# Altium PCB PCB.PcbDoc
Units mm, origin at the board's own origin, x right, y up, seen from the top; angles counter-clockwise.
Board outline 20 x 20 mm, 2 copper layers (Top Layer, Bottom Layer), stack 1.671 mm thick; 5 components, 4 nets, 10 pads, 1 vias.
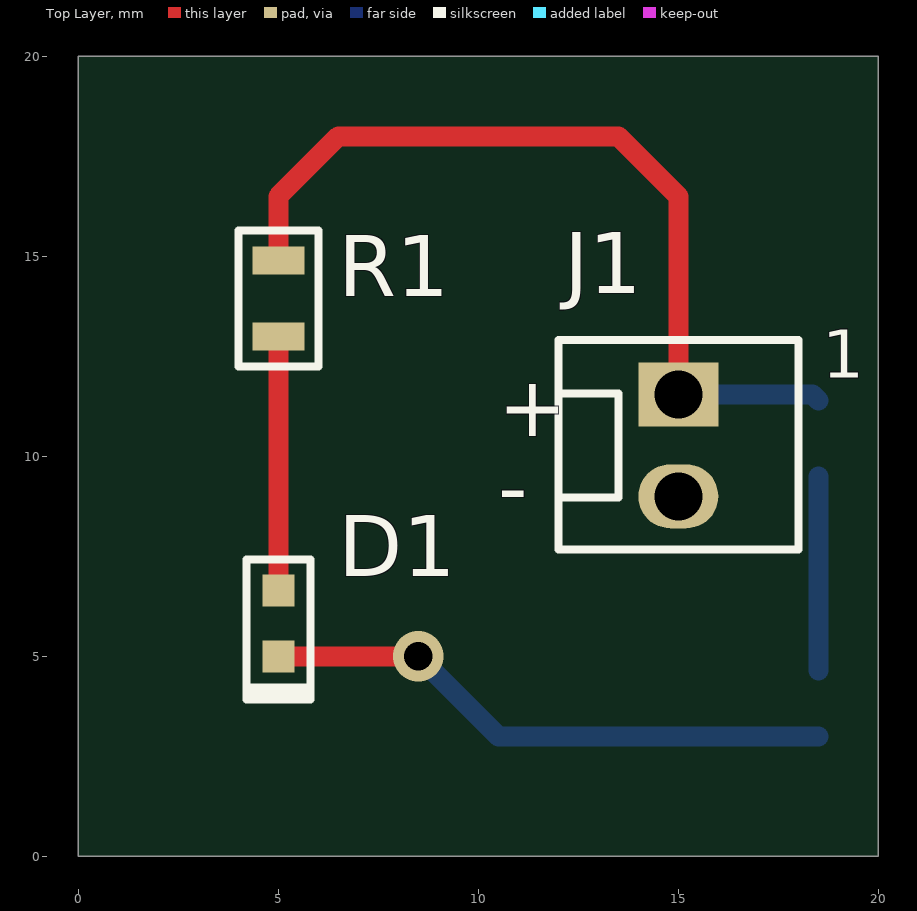
[diagram p0: Top Layer view]
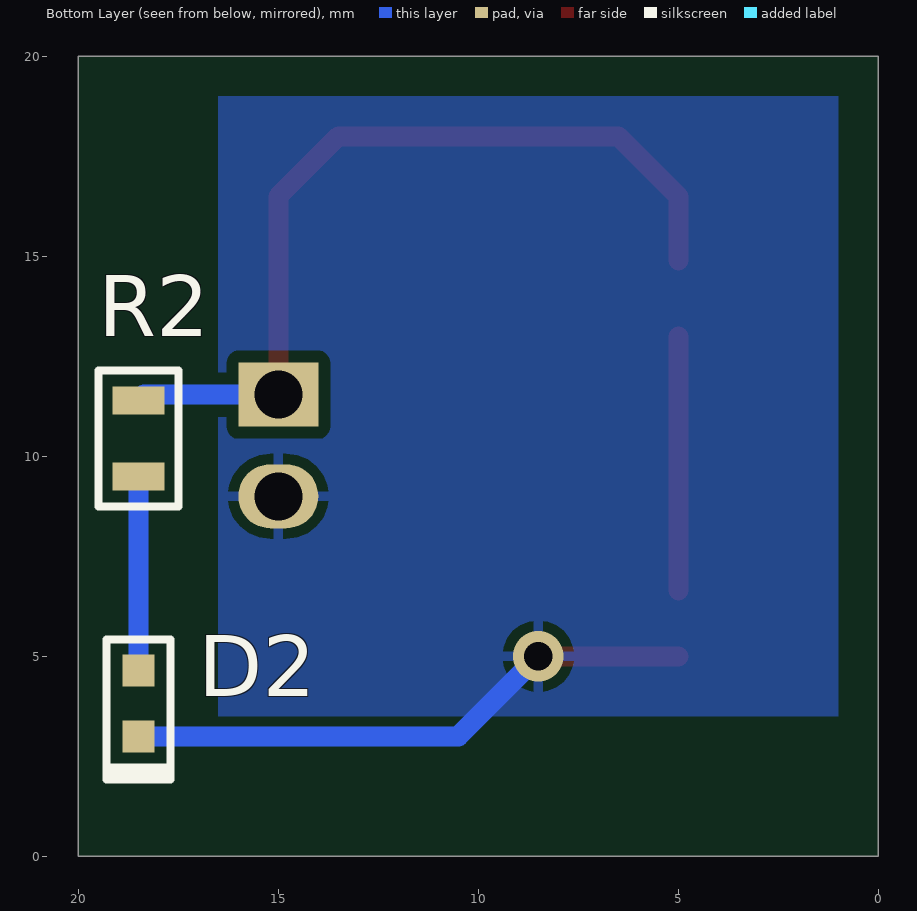
[diagram p1: Bottom Layer view, seen from below]
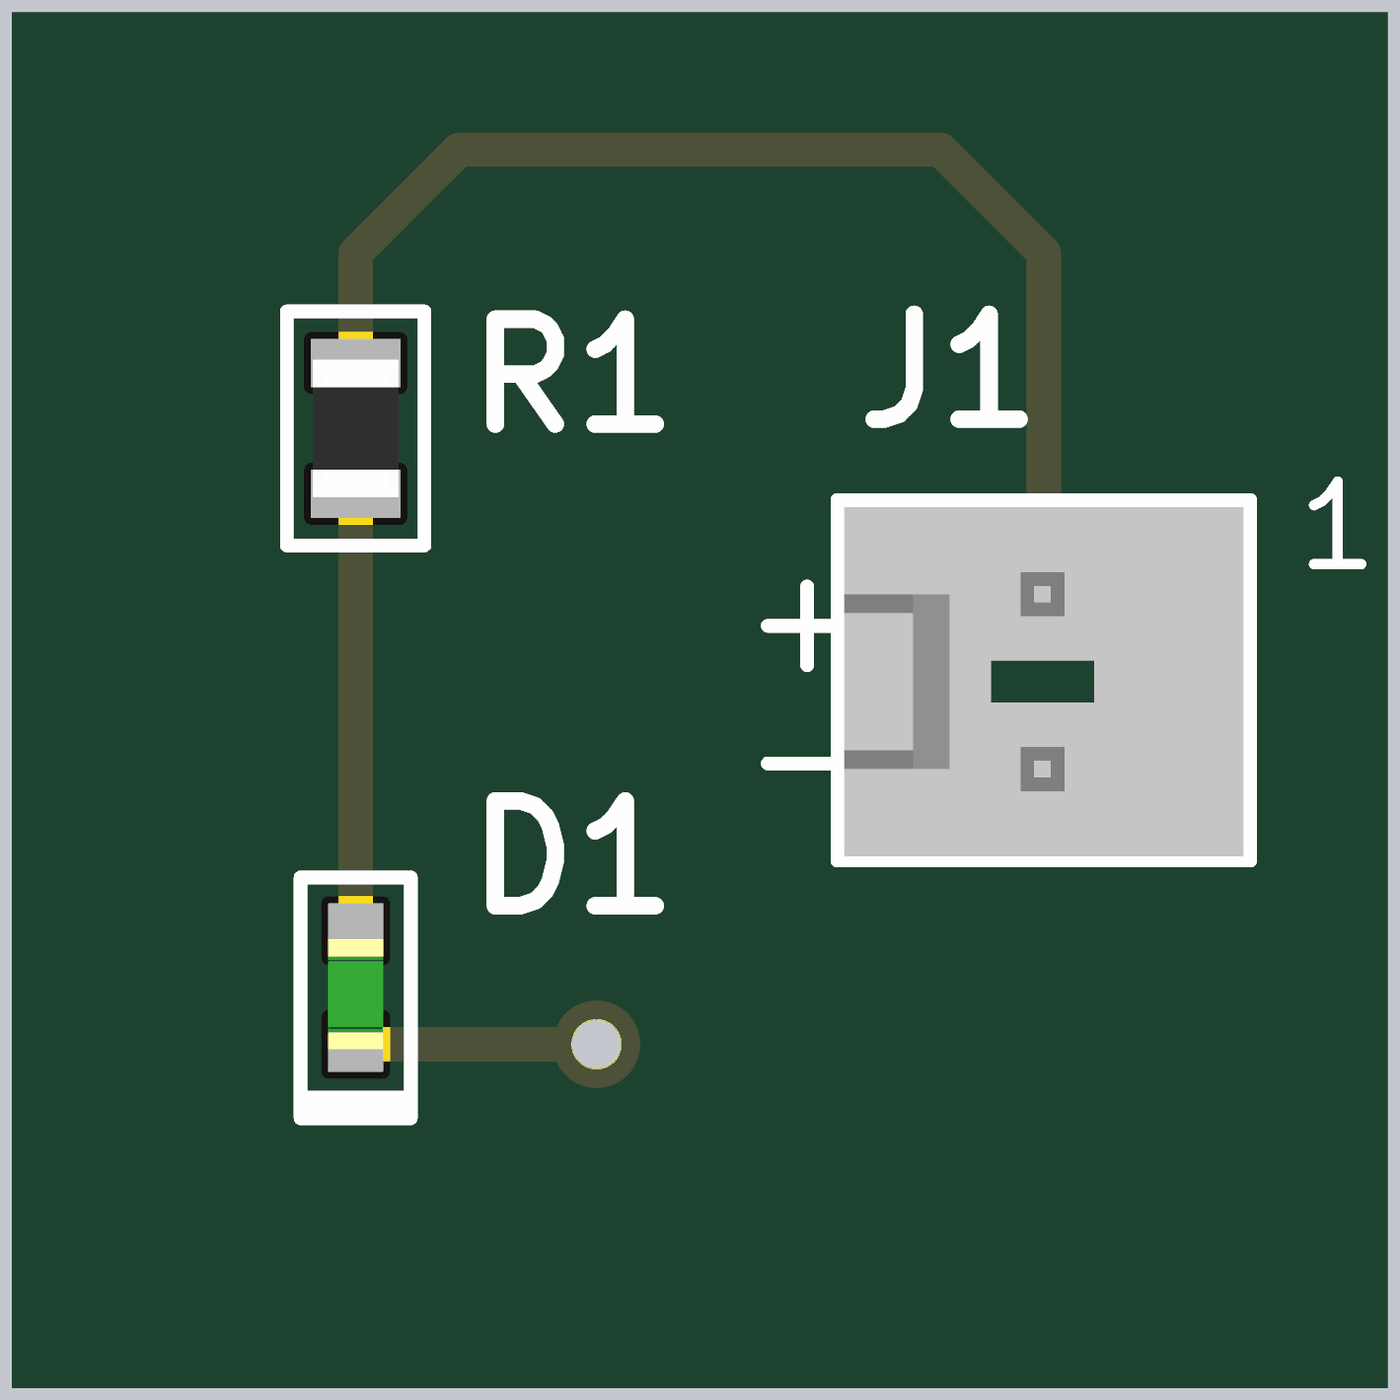
[diagram p2: 3D render of the assembled board from above, using the file's embedded part models]

## Layer stack, top to bottom
Top Solder: solder mask 0.0102, Solder Resist, Dk 3.5
Top Layer: signal copper 0.0356
Dielectric 1: dielectric 1.6, FR-4, Dk 4.8
Bottom Layer: signal copper 0.0356
Bottom Solder: solder mask 0.0102, Solder Resist, Dk 3.5

## Board outline
0,20 20,20 20,0 0,0

## Design rules (kind name [scope] priority, off if disabled: settings)
Clearance [All] p1: gap=0.3 ignorepadtopadclearanceinfootprint=FALSE
PolygonConnect [All] p1: connectstyle=Relief reliefconductorwidth=0.254 reliefentries=4 polygonreliefangle="90 Angle" airgapwidth=0.254
RoutingVias [All] p1: holewidth=0.3 width=0.6 viastyle="Through Hole" minholewidth=0.3 minwidth=0.6 maxholewidth=0.3 maxwidth=0.6
SilkToSolderMaskClearance [IsPad] p1: minsilkscreentomaskgap=0.1 clearancetoexposedcopper=TRUE
SolderMaskExpansion [All] p1: expansion=0.102
Width [All] p1: maxlimit=1 minlimit=0.3 preferedwidth=0.5
29 further rules are at their usual default settings.

## Components (designator, comment, footprint, x,y, rotation, side; value= is the part's Value field where it differs from the comment)
D1 "Blue LED" LED0603B 5,5.825 r90 top
D2 "Blue LED" LED0603B 18.5,3.825 r90 bottom
J1 "1x2 Header" HDR1X2 15,11.54 r0 top
R1 "360R" R0805 5,13.95 r90 top
R2 "360R" R0805 18.5,10.45 r90 bottom

## Footprints (in the part's own frame and the unit in brackets; to place one, negate y for a bottom-side part, rotate by r counter-clockwise, add the part's x,y. Pads: shape width x height; smd on the part's side, far side on the other; paste and mask are expansions set on the pad)
HDR1X2 [mm]
  rect 2x1.6 hole 1.2: 1(0,0)
  oval 2x1.6 hole 1.2: 2(0,-2.54)
  silkscreen extent -3,-3.87 3,1.37, body extent -2.9,-3.81 2.9,1.27, height 11.71
LED0603B [mm]
  rect 0.8x0.8 smd: 1(-0.825,0) 2(0.825,0)
  silkscreen extent -1.9,-0.8 1.6,0.8, body extent -0.9,-0.4 0.7,0.4, height 0.4
R0805 [mm]
  rect 0.7x1.3 smd: 1(-0.95,0) 2(0.95,0)
  silkscreen extent -1.7,-1 1.7,1, body extent -1,-0.62 1,0.62, height 0.61

## Part data
D1 D2: library part LNJ926W8CRA, "LED BLUE UTSS TYPE SMD", Forward Current If=5mA, Forward Voltage=2.9V, LED Colour=Blue, Manufacturer="Panasonic SSG", Supplier Part Number 1=P13484CT-ND, Automotive Qualification Standard=-, Bulb Size="0.8mm x 1.6mm", Category=LED, ComponentLink1Description=http://www.farnell.com/datasheets/1915208.pdf?src-supplier=Element14, ComponentLink1URL=http://www.farnell.com/datasheets/1915208.pdf?src-supplier=Element14, ComponentLink2Description=http://www.mouser.com/ds/2/315/LNJ926W8CRA_CEK-226062.pdf?src-supplier=Mouser, ComponentLink2URL=http://www.mouser.com/ds/2/315/LNJ926W8CRA_CEK-226062.pdf?src-supplier=Mouser, LED Mounting=SMD, Lens Shape=Rectangular, Luminous Intensity=11.5mcd, Manufacturer Part Number=LNJ926W8CRA, MSL=-, Packaging=Each, Pricing 1="1=0.36, 10=0.276, 100=0.2287, 500=0.2093, 1000=0.2024 (USD)", Product Range=-, Stock 1=28564, Supplier 1=Digi-Key, SVHC="1,3,5-Tris(oxiran-2-ylmethyl)-1,3,5-triazinane-2,4,6-trione (TGIC) (15-Jun-2015)", Viewing Angle=-, Wavelength Typ=470nm
J1: library part 22-29-2021, "Conn Wire to Board HDR 2 POS 2.54mm Solder ST Thru-Hole Bag", Insulation Resistance (MOhm)=1000, Manufacturer=Molex, Maximum Contact Resistance (mOhm)=10, Maximum Current Rating (A)=4/Contact, Maximum Operating Temperature (°C)=80, Maximum Voltage Rating=500V, Minimum Operating Temperature (°C)=-40, Supplier Part Number 1=WM2744-ND, Body Orientation=Straight, Category=Connectors, ComponentLink1Description=https://www.molex.com/pdm_docs/sd/022292021_sd.pdf?src-supplier=Digi-Key, ComponentLink1URL=https://www.molex.com/pdm_docs/sd/022292021_sd.pdf?src-supplier=Digi-Key, ECCN (US)=EAR99, Gender=HDR, HTS=8536.69.40.40, Manufacturer Part Number=22-29-2021, Mating Cycle (Cycles)=25, Mounting="Through Hole", Number of Contacts=2, Number of Rows=1, Packaging=Bag, Part Status=Active, Pricing 1="1=0.48, 10=0.452, 100=0.3163, 500=0.2711, 1000=0.2259, 5000=0.1937, 10000=0.1807 (USD)", Product Depth (mm)=5.8, Product Height (mm)=11.7, Product Length (mm)=5.08, Product Weight (g)=0.216, Stock 1=18862, Supplier 1=Digi-Key, Terminal Pitch (mm)=2.54, Termination Method=Solder, Tradename=KK®, Type="Wire to Board"
R1 R2: library part CRCW0805360RFKEA, "RES SMD 360 OHM 1% 1/8W 0805", Case Size=805, Current Sensing=No, Depth Tolerance (mm)=±0.15, Height Tolerance (mm)=±0.05, Length Tolerance (mm)=-0.1|+0.2, Manufacturer=Vishay, Maximum Operating Temperature (°C)=155, Maximum Voltage Rating (V)=150, Minimum Operating Temperature (°C)=-55, Package Shape=Rectangular, Package Type=SMD, Power Rating (W)="0.125 (1/8)", Resistance Value (Ohm)=360, Supplier Part Number 1=541-360CCT-ND, Temperature Coefficient (ppm/°C)=±100, Temperature Range @ Derated Power (="70 to 155", Tolerance=1%, Anti-Sulfurated=No, Anti-Surge=No, Category=Resistors, ComponentLink1Description=http://www.vishay.com/docs/20035/dcrcwe3.pdf?src-supplier=Digi-Key, ComponentLink1URL=http://www.vishay.com/docs/20035/dcrcwe3.pdf?src-supplier=Digi-Key, ECCN (US)=EAR99, EU RoHS="Compliant with Exemption", Fail Safe Fusible Resistor=No, Manufacturer Part Number=CRCW0805360RFKEA, Mounting="Surface Mount", Number of Terminals=2, Package/Case=805, Packaging="Tape and Reel", Part Status=Active, Pricing 1="1=0.1, 10=0.062, 100=0.0254, 1000=0.0114, 2500=0.0099 (USD)", Product Depth (mm)=1.25, Product Height (mm)=0.45, Product Length (mm)=2, Product Weight (g)=0.0055, Stock 1=5538, Supplier 1=Digi-Key, Technology="Thick Film", Termination Style=Pad

## Via types
v1: diameter 1.27, hole 0.711, Top Layer to Bottom Layer, tented both sides, 1 vias

## Nets (pads, with @x,y where several pads share a name; then routed paths per layer and width w, separated by ;. In a path a pad name is that pad's centre, name@x,y a point inside that pad or via, vN(x,y) a via of type N, cw(c..) or ccw(c..) an arc to the next point about the centre after c; other vN are vias at no path point)
+3.3V: J1.1 R1.2 R2.2 | length 21.4
  Top Layer w0.5: R1.2 5,16.5 6.5,18 13.5,18 15,16.5 J1.1
  Bottom Layer w0.5: J1.1 18.36,11.54 R2.2
GND: D1.1 D2.1 J1.2 | length 14.3
  Top Layer w0.5: D1.1 v1(8.5,5)
  Bottom Layer w0.5: v1(8.5,5) 10.5,3 D2.1
R-LED1: D1.2 R1.1 | length 6.3
  Top Layer w0.5: D1.2 R1.1
R-LED2: D2.2 R2.1 | length 4.9
  Bottom Layer w0.5: D2.2 R2.1

## Polygon pours and split planes (outlines as drawn)
GND on Bottom Layer "GndPlane" (solid, pour order 0): 1,19 16.5,19 16.5,3.5 1,3.5

## Silkscreen, mask and mechanical layers (free items; w line width, h text height)
Top Overlay:
  text "+" at 10.5,10.5 h1.5
  text "-" at 10.5,8.5 h1.5
Board Outline:
  the board outline again, w0.15

## Text inside footprints (layer, text, board x,y; h text height)
J1: Top Overlay "1" at 18.6,11.97 h1.2